# EAGLE board valve_driver_pwm_ctrl (EAGLE 6.6.0)
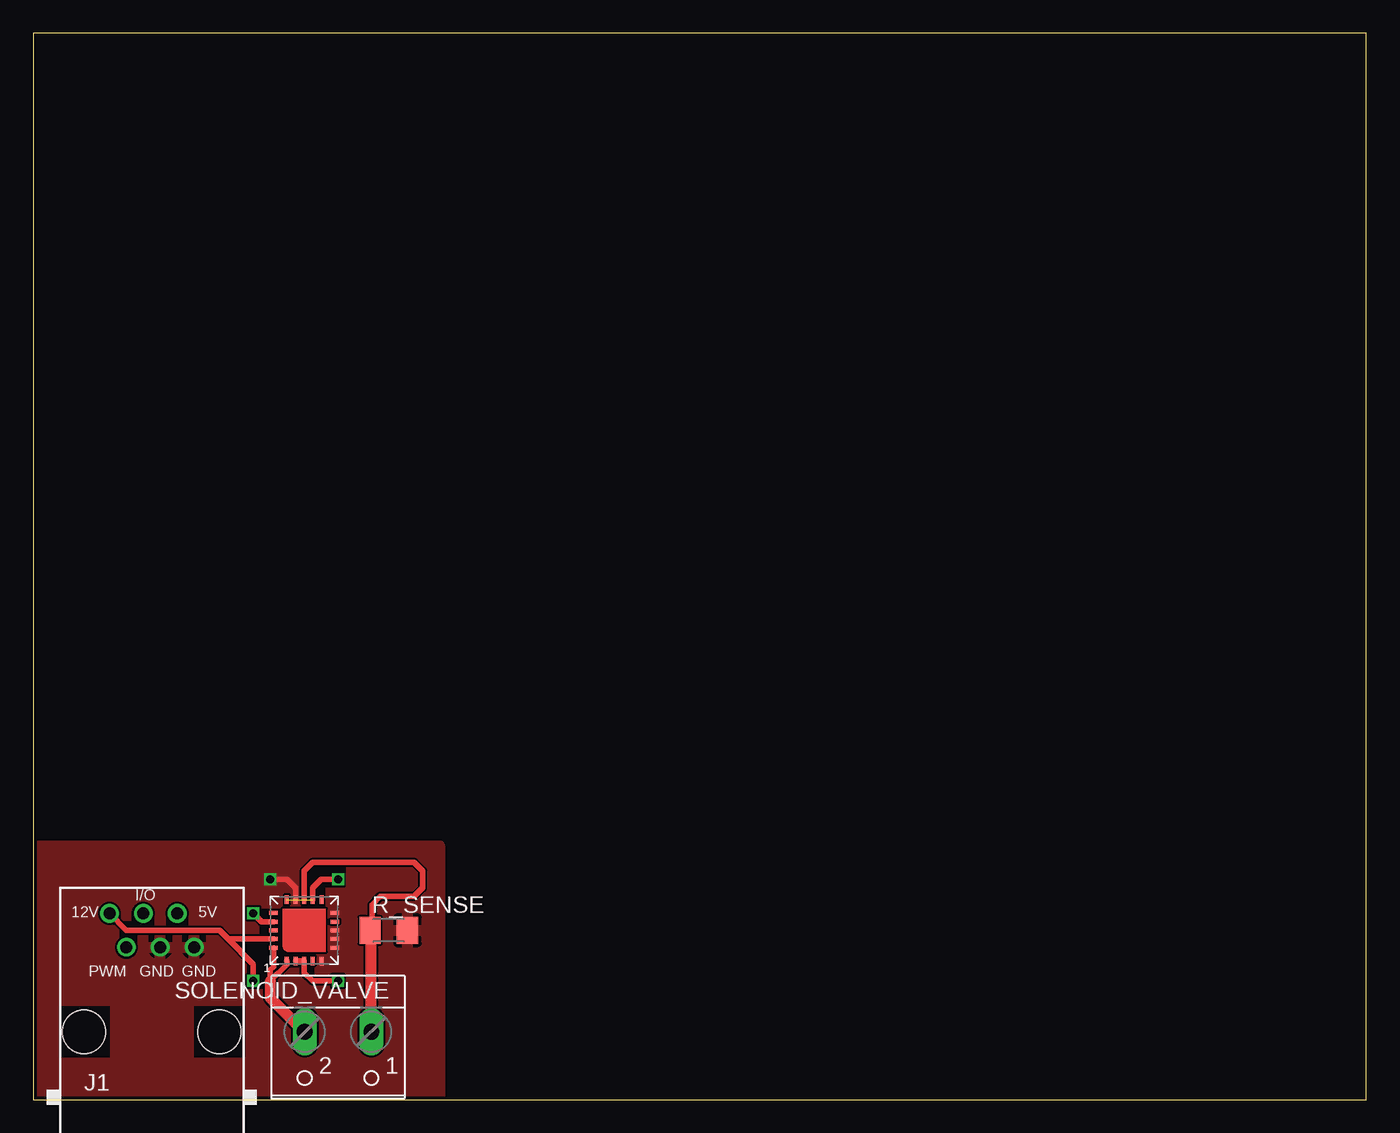
[diagram p0: board, top side]
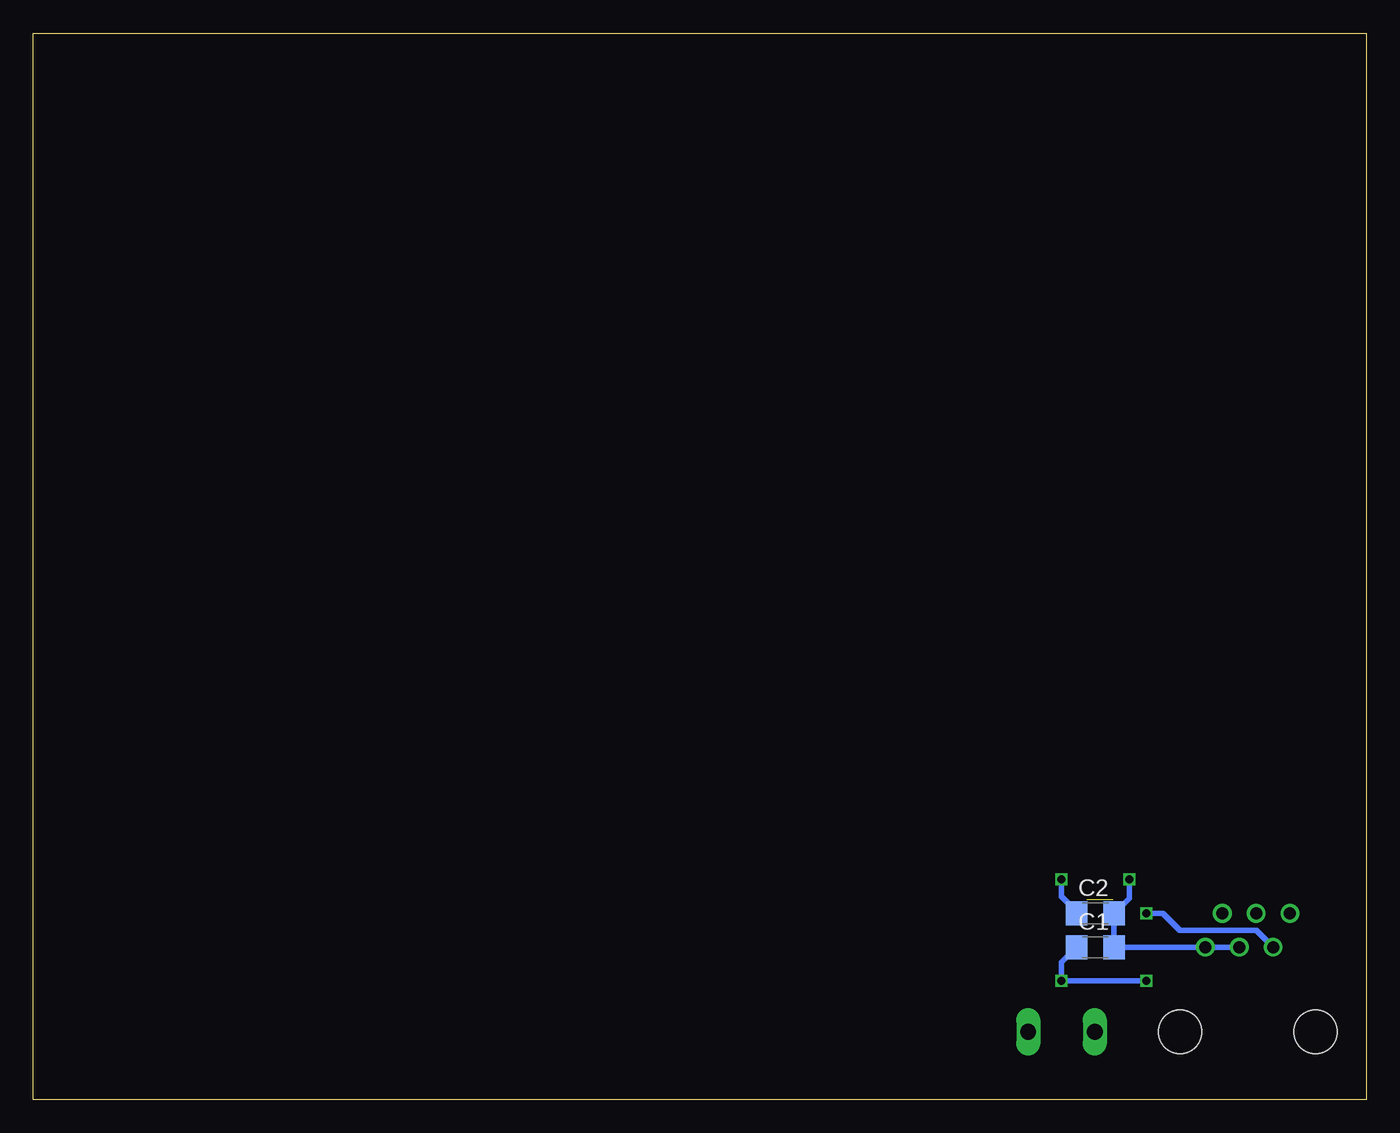
[diagram p1: board, bottom side, seen from below]

Size 100 x 80 mm. Coordinates in mm from the lower left corner, seen from the top.
Outline: 0,0 100,0 100,80 0,80 0,0
Copper layers (1*16): Top 0.035mm / dielectric 1.5mm / Bottom 0.035mm
Design rules "Fusion_eagle_rule_v1.1": minimum track width 6mil, minimum drill 12mil, track to track 6mil, track to pad 6mil, pad to pad 6mil, via to via 6mil, smd to smd 0mil, copper to edge 10mil, drill to drill 10mil, minimum pad ring 10mil, minimum via ring 6mil, stop-mask expansion 2mil, vias tented up to drill 100mil, thermal gap 10mil

## Footprints (pad centres in the part's own frame; a part is rotated, then mirrored left to right if it is on the bottom)
C1206 = smd 1.6 x 1.8: 1 -1.4,0; 2 1.4,0
RJ12-STRAIGHT = drill 0.9 pad 1.4: +5V 1.905,8.89; +12V -3.175,8.89; GND1 3.175,6.35; GND2 0.635,6.35; I/O -0.635,8.89; PWM -1.905,6.35 | hole 3.251: -5.08,0; 5.08,0
M1206 = smd 1.6 x 2: 1 -1.4,0; 2 1.4,0
W237-102 = drill 1.194 long: 1 -2.5,-1.27; 2 2.5,-1.27
TQFN-20 = smd 0.3 x 0.65: PIN1 -1.3,-2.3; PIN2 -0.65,-2.3; PIN3 0,-2.3; PIN4 0.65,-2.3; PIN11 1.3,2.3; PIN12 0.65,2.3; PIN13 0,2.3; PIN14 -0.65,2.3; PIN15 -1.3,2.3; PN5 1.3,-2.3 | smd 0.65 x 0.3: PIN6 2.3,-1.3; PIN7 2.3,-0.65; PIN8 2.3,0; PIN9 2.3,0.65; PIN10 2.3,1.3; PIN16 -2.3,1.3; PIN17 -2.3,0.65; PIN18 -2.3,0; PIN19 -2.3,-0.65; PIN20 -2.3,-1.3

## Placement (x,y rotation side)
C1  100nF  [C1206]  20.32,11.43 0 bottom
C2  100nF  [C1206]  20.32,13.97 0 bottom
J1  RJ12STRAIGHT  [RJ12-STRAIGHT]  8.89,5.08 0 top
R_SENSE  0.56  [M1206]  26.67,12.7 0 top
SOLENOID_VALVE  [W237-102]  22.86,3.81 180 top
U$1  MAX16804ATP+  [TQFN-20]  20.32,12.7 0 top

## Library data of the parts
C1 C2 R_SENSE = rcl
J1 = lpatiny
SOLENOID_VALVE = con-wago-500; MPN: 237-102; OC_FARNELL: unknown; OC_NEWARK: 70K9898
U$1 = driver

## Nets
GND: C1.2 C2.2 J1.GND1 J1.GND2 R_SENSE.2 U$1.PIN6 U$1.PIN7 U$1.PIN8 U$1.PIN10 U$1.PIN14 U$1.PN5
N$3: SOLENOID_VALVE.2 U$1.PIN1 U$1.PIN20
N$4: C2.1 U$1.PIN12 U$1.PIN15
N$7: R_SENSE.1 SOLENOID_VALVE.1 U$1.PIN13
PWM: J1.PWM U$1.PIN17
VCC: C1.1 J1.+12V U$1.PIN2 U$1.PIN3 U$1.PIN19

## Tracks (layer width: path | path; a pad name or v marks a point on that pad's centre or on a via)
GND  (via drill 0.6)
  Top 0.406: v17.78,16.51 19.05,16.51 19.67,15.89 U$1.PIN14
  Bottom 0.406: J1.GND2 C1.2 C2.2 17.78,15.11 v17.78,16.51
  pour Top: 0,19.05 30.48,19.05 30.48,0 0,0
N$3
  Top 0.406: U$1.PIN1 19.05,10.37 19.05,10.16 17.78,8.89 17.78,9.72 18.02,9.96 U$1.PIN20 | 20.32,5.08 SOLENOID_VALVE.2
  Top 0.813: 20.32,5.08 17.78,7.62 17.78,8.89
N$4  (via drill 0.6)  (1 unrouted)
  Top 0.406: v22.86,16.51 21.59,16.51 20.97,15.89 U$1.PIN12
  Bottom 0.406: C2.1 21.59,13.97 22.86,15.24 v22.86,16.51
N$7
  Top 0.406: U$1.PIN13 20.32,17.14 20.95,17.78 28.57,17.78 29.21,17.14 29.21,15.88 28.57,15.24 26.04,15.24 25.4,14.61 25.4,12.83 R_SENSE.1
  Top 0.813: SOLENOID_VALVE.1 25.36,12.61 R_SENSE.1
PWM  (via drill 0.6)
  Top 0.406: U$1.PIN17 17.13,13.35 v16.51,13.97
  Bottom 0.406: v16.51,13.97 15.24,13.97 13.97,12.7 8.26,12.7 J1.PWM
VCC  (via drill 0.6)
  Top 0.406: J1.+12V 6.99,12.7 13.97,12.7 14.61,12.06 | U$1.PIN2 U$1.PIN3 20.32,9.53 20.95,8.89 v22.86,8.89 | 14.61,12.06 16.51,10.16 v16.51,8.89 | U$1.PIN19 18,12.06 14.61,12.06
  Bottom 0.406: C1.1 22.86,10.29 v22.86,8.89 v16.51,8.89